# Altium PCB LF_v5_SensorBoard.PcbDoc
Units mm, origin at the board's own origin, x right, y up, seen from the top; angles counter-clockwise.
Board outline 81 x 20.29 mm, 2 copper layers (Top Layer, Bottom Layer), stack 1.571 mm thick; 27 components, 22 nets, 103 pads, 20 vias.
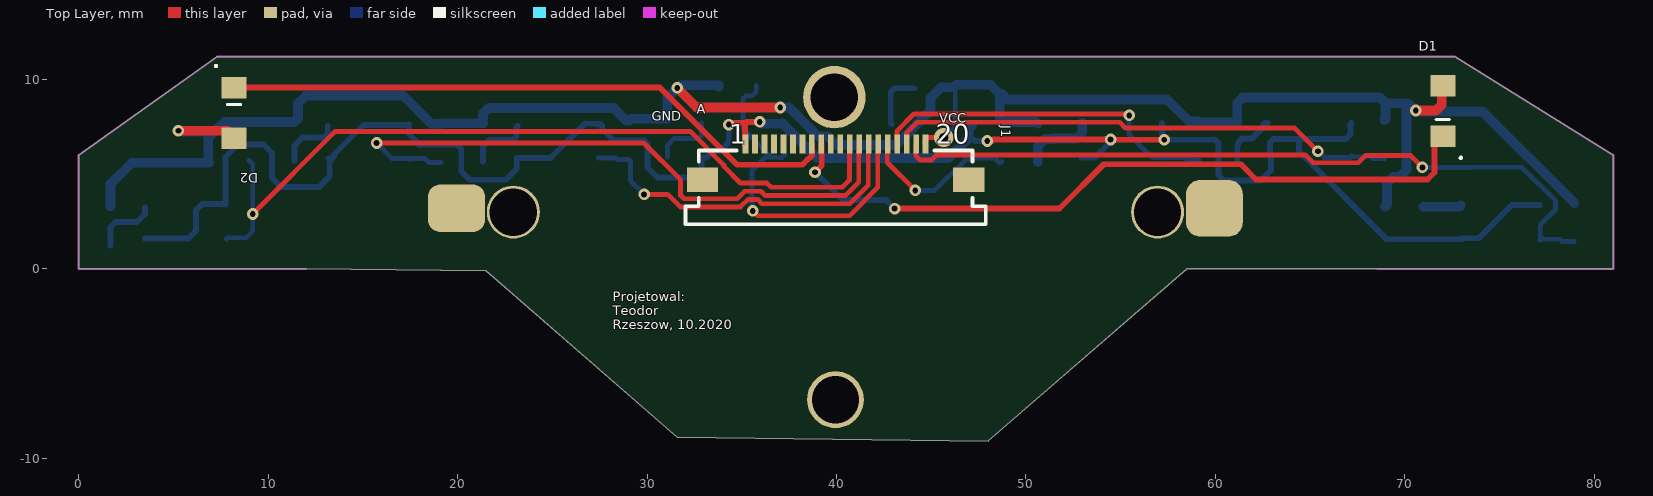
[diagram p0: Top Layer view]
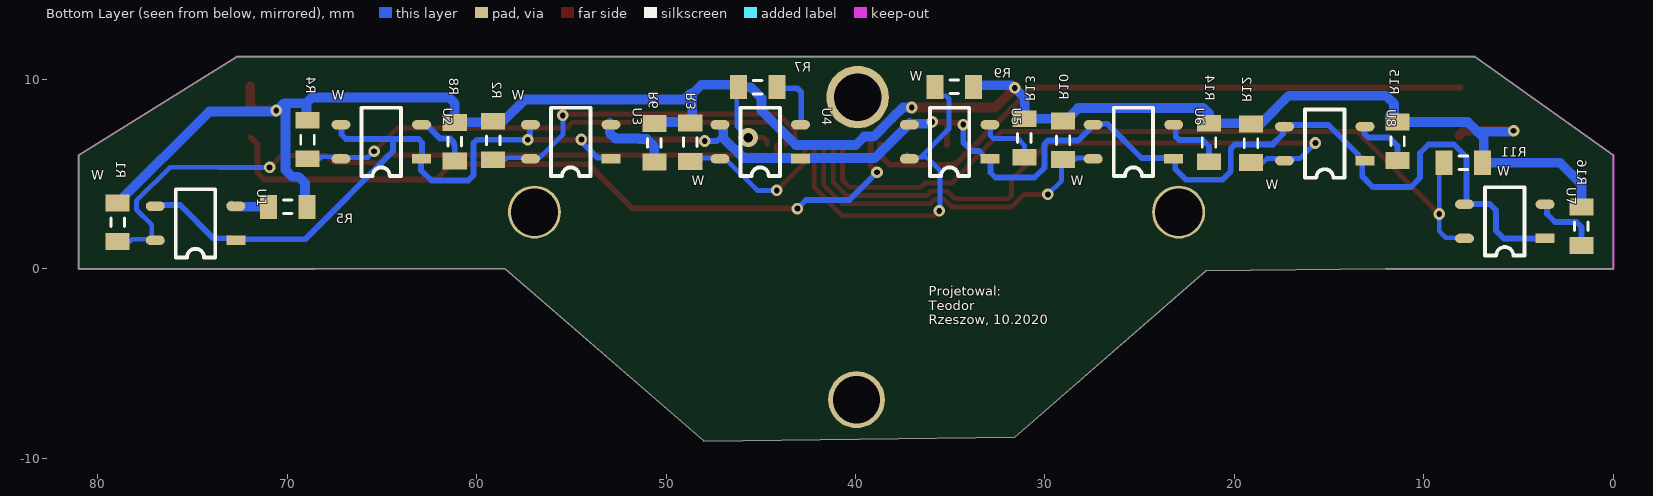
[diagram p1: Bottom Layer view, seen from below]
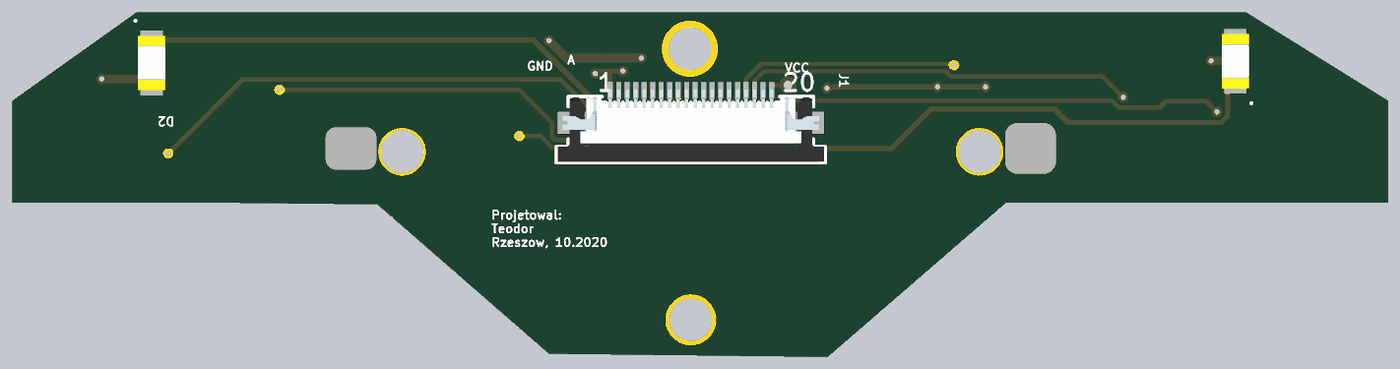
[diagram p2: 3D render of the assembled board from above, using the file's embedded part models]
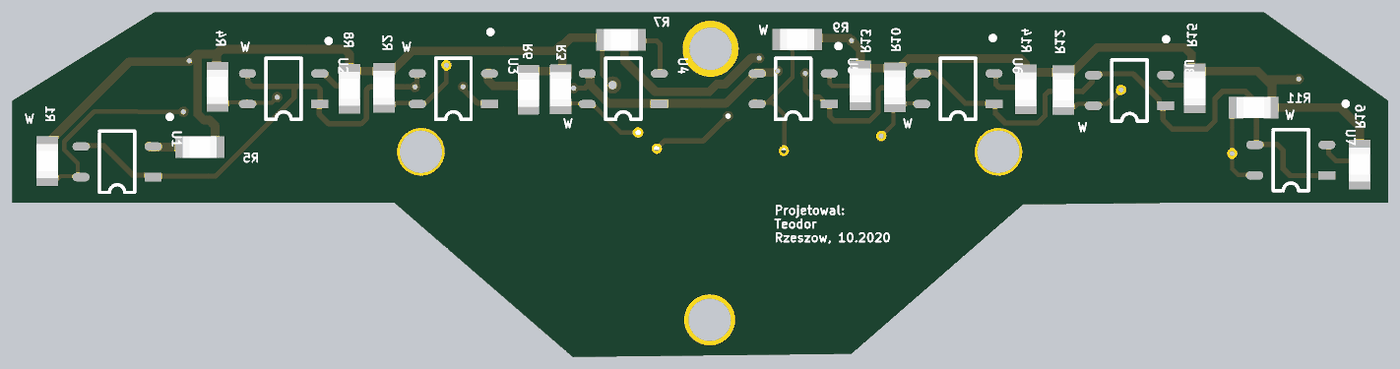
[diagram p3: 3D render of the assembled board from below, using the file's embedded part models]

## Layer stack, top to bottom
Top Solder: solder mask 0.0102, Solder Resist, Dk 3.5
Top Layer: signal copper 0.0356
Dielectric1: core 1.5, FR-4, Dk 4.8
Bottom Layer: signal copper 0.0356
Bottom Solder: solder mask 0.0102, Solder Resist, Dk 3.5

## Board outline
0,0 12,0 21.5,-0.1 31.604,-8.9 48,-9.086 58.5,0 68.449,0 81,-0.002 81,6 72.65,11.2 7.3,11.2 0,6

## Design rules (kind name [scope] priority, off if disabled: settings)
Clearance VIA-PAD [IsVIA vs IsPAD] p1: gap=0.152 ignorepadtopadclearanceinfootprint=FALSE except(0: Arc-Hole Track-Hole SMDPad-Hole THPad-Hole Via-Hole Fill-Hole Poly-Hole Region-Hole Text-Hole)
Clearance Clearance_REF [HasFootprint('Designator_blacking') or HasFootprint('Designator')] p2: gap=0.203 ignorepadtopadclearanceinfootprint=FALSE except(0: Arc-Hole Track-Hole SMDPad-Hole THPad-Hole Via-Hole Fill-Hole Poly-Hole Region-Hole Text-Hole)
Clearance Clearance_REF60 [HasFootprint('Designator_60_blacking') or HasFootprint('Designator_60')] p3: gap=0.381 ignorepadtopadclearanceinfootprint=FALSE except(0: Arc-Hole Track-Hole SMDPad-Hole THPad-Hole Via-Hole Fill-Hole Poly-Hole Region-Hole Text-Hole)
Clearance Clearance_28mil [HasFootprint('SFT01')] p4: gap=0.711 ignorepadtopadclearanceinfootprint=FALSE except(0: Arc-Hole Track-Hole SMDPad-Hole THPad-Hole Via-Hole Fill-Hole Poly-Hole Region-Hole Text-Hole)
Clearance Clearance_26mil [HasFootprint('SW-2') or HasFootprint('SW-4') or HasFootprint('SW-6') or HasFootprint('SW-8')] p5: gap=0.66 ignorepadtopadclearanceinfootprint=FALSE except(0: Arc-Hole Track-Hole SMDPad-Hole THPad-Hole Via-Hole Fill-Hole Poly-Hole Region-Hole Text-Hole)
Clearance Clearance_20mil [HasFootprint('NXW-02SMD') or HasFootprint('NXW-03SMD') or HasFootprint('NXW-04SMD') or HasFootprint('NXW-05SMD') or HasFootprint('NXW-06SMD') or HasFootprint('NXW-08SMD') or HasFootprint('NXW-10SMD') or HasFootprint('NXW-12SMD') or HasFootprint('GK2X5D_SMD_(PBMTD10S)')or HasFootprint('WE-PD2SA')   or HasFootprint('LK2X10E_SMD_(BHT20S)')] p6: gap=0.508 ignorepadtopadclearanceinfootprint=FALSE except(0: Arc-Hole Track-Hole SMDPad-Hole THPad-Hole Via-Hole Fill-Hole Poly-Hole Region-Hole Text-Hole)
Clearance Clearance_7.68mil [HasFootprint('TQFP64') vs IsPad] p7: gap=0.195 ignorepadtopadclearanceinfootprint=FALSE except(0: Arc-Hole Track-Hole SMDPad-Hole THPad-Hole Via-Hole Fill-Hole Poly-Hole Region-Hole Text-Hole)
Clearance InPolygon [InPolygon] p8: gap=0.381 ignorepadtopadclearanceinfootprint=FALSE except(0: Arc-Hole Track-Hole SMDPad-Hole THPad-Hole Via-Hole Fill-Hole Poly-Hole Region-Hole Text-Hole)
Clearance Keep-Out [OnLayer('Keep-Out Layer')] p9: gap=0.406 ignorepadtopadclearanceinfootprint=FALSE except(0: Arc-Hole Track-Hole SMDPad-Hole THPad-Hole Via-Hole Fill-Hole Poly-Hole Region-Hole Text-Hole)
Clearance RS-ZAS [InNetClass('RS_IBIS') vs InNetClass('ZAS')] p10: gap=1.778 ignorepadtopadclearanceinfootprint=FALSE except(0: Arc-Hole Track-Hole SMDPad-Hole THPad-Hole Via-Hole Fill-Hole Poly-Hole Region-Hole Text-Hole)
Clearance ON_GND-VT [InNet('ON_GND') vs InNet('VT')] p11: gap=1.778 ignorepadtopadclearanceinfootprint=FALSE except(0: Arc-Hole Track-Hole SMDPad-Hole THPad-Hole Via-Hole Fill-Hole Poly-Hole Region-Hole Text-Hole)
Clearance VT_Zasilanie [InNet('VT') vs InNetClass('ZAS')] p12: gap=1.778 ignorepadtopadclearanceinfootprint=FALSE except(0: Arc-Hole Track-Hole SMDPad-Hole THPad-Hole Via-Hole Fill-Hole Poly-Hole Region-Hole Text-Hole)
Clearance GND-VT [InNet('VT') vs InNet('GND')] p13: gap=1.778 ignorepadtopadclearanceinfootprint=FALSE except(0: Arc-Hole Track-Hole SMDPad-Hole THPad-Hole Via-Hole Fill-Hole Poly-Hole Region-Hole Text-Hole)
Clearance GND_ETH_WTÓRNA [InNetClass('ETH_WTÓRNA') vs (InNet('GND') AND InPolygon)] p14: gap=1.5 ignorepadtopadclearanceinfootprint=FALSE except(0: Arc-Hole Track-Hole SMDPad-Hole THPad-Hole Via-Hole Fill-Hole Poly-Hole Region-Hole Text-Hole)
Clearance GNT_BOTTOM [InNetClass('RS_IBIS') vs InNetClass('GND_ZAS-ON_GND')] p15: gap=1.778 ignorepadtopadclearanceinfootprint=FALSE except(0: Arc-Hole Track-Hole SMDPad-Hole THPad-Hole Via-Hole Fill-Hole Poly-Hole Region-Hole Text-Hole)
Clearance ON_GND-GND [InNet('ON_GND') vs InNet('GND')] p16: gap=1.778 ignorepadtopadclearanceinfootprint=FALSE except(0: Arc-Hole Track-Hole SMDPad-Hole THPad-Hole Via-Hole Fill-Hole Poly-Hole Region-Hole Text-Hole)
Clearance ON_GND-ALL [InNet('ON_GND')] p17: gap=0.381 ignorepadtopadclearanceinfootprint=FALSE except(0: Arc-Hole Track-Hole SMDPad-Hole THPad-Hole Via-Hole Fill-Hole Poly-Hole Region-Hole Text-Hole)
Clearance GND_ZAS_GND [InNet('GND_ZAS') vs InNet('GND')] p18: gap=1.778 ignorepadtopadclearanceinfootprint=FALSE except(0: Arc-Hole Track-Hole SMDPad-Hole THPad-Hole Via-Hole Fill-Hole Poly-Hole Region-Hole Text-Hole)
Clearance GND_ZAS-ALL [InNet('GND_ZAS')] p19: gap=0.381 ignorepadtopadclearanceinfootprint=FALSE except(0: Arc-Hole Track-Hole SMDPad-Hole THPad-Hole Via-Hole Fill-Hole Poly-Hole Region-Hole Text-Hole)
Clearance 3.3V-ALL [InNetClass('3.3V_L2_1')] p20: gap=0.508 ignorepadtopadclearanceinfootprint=FALSE except(0: Arc-Hole Track-Hole SMDPad-Hole THPad-Hole Via-Hole Fill-Hole Poly-Hole Region-Hole Text-Hole)
Clearance Clearance_1 [isvia vs isvia] p21: gap=0.305 ignorepadtopadclearanceinfootprint=FALSE except(0: Arc-Hole Track-Hole SMDPad-Hole THPad-Hole Via-Hole Fill-Hole Poly-Hole Region-Hole Text-Hole)
Clearance "raster 0.5mm" [(InPadClass('Pady 0.5mm')) vs IsTrack  Or IsPad] p22: gap=0.193 ignorepadtopadclearanceinfootprint=FALSE except(0: Arc-Hole Track-Hole SMDPad-Hole THPad-Hole Via-Hole Fill-Hole Poly-Hole Region-Hole Text-Hole)
Clearance Clearance_2 [All] p23: gap=0.178 ignorepadtopadclearanceinfootprint=FALSE except(0: Arc-Hole Track-Hole SMDPad-Hole THPad-Hole Via-Hole Fill-Hole Poly-Hole Region-Hole Text-Hole)
ComponentClearance [All] p1: gap=0 collisioncheckmode=3 verticalgap=0 showdistances=FALSE
HoleSize HoleSize_Ramka [HasFootprint('hole_frame') or HasFootprint('hole_frame1')] p1: absolutevalues=TRUE maxlimit=3 minlimit=3 maxpercent=80.000 minpercent=20.000
HoleSize [All] p2: absolutevalues=TRUE maxlimit=3.2 minlimit=0.305 maxpercent=80.000 minpercent=20.000
MinimumSolderMaskSliver MinimumSolderMaskSliver_Ramka [HasFootprint('LOGO-05X18_so')] p1: minsoldermaskwidth=0
MinimumSolderMaskSliver MinimumSolderMaskSliver_Via-Pad [IsVia vs IsPad] p2: minsoldermaskwidth=0.508
MinimumSolderMaskSliver [All] p3: minsoldermaskwidth=0.14
PolygonConnect PolygonConnect_EP [HasFootprintPad( 'TO-263_T&B',2) vs OnBottomLayer or OnTopLayer] p1: connectstyle=Direct reliefconductorwidth=0.254 reliefentries=4 polygonreliefangle="90 Angle" airgapwidth=0.254
PolygonConnect PolygonConnect_VIA [ISVIA] p2: connectstyle=Direct reliefconductorwidth=0.254 reliefentries=4 polygonreliefangle="90 Angle" airgapwidth=0.254
PolygonConnect PolygonConnect_30mil [HasFootprint('CE-SMD-J80_(H7,9MM)')] p3: connectstyle=Relief reliefconductorwidth=0.762 reliefentries=4 polygonreliefangle="90 Angle" airgapwidth=0.254
PolygonConnect PolygonConnect_24mil [HasFootprint('3528-SMDB') or HasFootprint('6032-SMDC') or HasFootprint('7343-SMDD')] p4: connectstyle=Relief reliefconductorwidth=0.61 reliefentries=4 polygonreliefangle="90 Angle" airgapwidth=0.254
PolygonConnect PolygonConnect_20mil [HasFootprint('0805R') or HasFootprint('0805C')or HasFootprint('1206R') or HasFootprint('1206C')] p5: connectstyle=Relief reliefconductorwidth=0.508 reliefentries=4 polygonreliefangle="90 Angle" airgapwidth=0.254
PolygonConnect PolygonConnect_16mil [HasFootprint('CF2040_V_(ZIF40-0,5MM)')] p6: connectstyle=Relief reliefconductorwidth=0.406 reliefentries=4 polygonreliefangle="90 Angle" airgapwidth=0.254
PolygonConnect PolygonConnect_14mil [HasFootprint('SOODIM-200_(TYCO,CONCRAFT 2,5V)') or HasFootprint('SOODIM-200_(TYCO,CONCRAFT 2,5V) - COLIBRI') or HasFootprint('TSSOP24') or HasFootprint('TSSOP20') or HasFootprint('TSSOP18') or HasFootprint('TSSOP16') or HasFootprint('TSSOP14') or HasFootprint('SSOP24-150-0.64') or HasFootprint('SOT-323-5')] p7: connectstyle=Relief reliefconductorwidth=0.356 reliefentries=4 polygonreliefangle="90 Angle" airgapwidth=0.254
PolygonConnect PolygonConnect_12mil [HasFootprint('CF2014_D_(ZIF14-0,5MM)') or HasFootprint('CF2040_U_(ODWROTNA NUMERACJA)') or HasFootprint('TQFP144') or HasFootprint('TQFP80') or HasFootprint('TQFP64') or HasFootprint('TQFP48') or HasFootprint('0603C') or HasFootprint('0603R') or HasFootprint('SOT-23-3') or HasFootprint('4D03')or HasFootprint('QFN16-0.65_(H1,6MM)')or HasFootprint('PLCC2') or HasFootprint('PLCC2-S')or HasFootprint('SFH5711')] p8: connectstyle=Relief reliefconductorwidth=0.305 reliefentries=4 polygonreliefangle="90 Angle" airgapwidth=0.254
PolygonConnect PolygonConnect_11mil [HasFootprint('QFN20_B&T') or HasFootprint('QFN24_B&T') or HasFootprint('QFN32_31_B&T') or HasFootprint('QFN32_34_B&T') or HasFootprint('QFN36_30x40_LT3958_B&T') or HasFootprint('QFN36_37_B&T') or HasFootprint('QFN36_44_B&T') or HasFootprint('QFN40_41_B&T') or HasFootprint('QFN40_44_B&T_1')or HasFootprint('QFN56_59_B&T')] p9: connectstyle=Relief reliefconductorwidth=0.279 reliefentries=4 polygonreliefangle="90 Angle" airgapwidth=0.254
PolygonConnect PolygonConnect_13mil [HasFootprint('QFN12-0.80_21_B&T') or HasFootprint('QFN16-0.65_21_B&T')] p10: connectstyle=Relief reliefconductorwidth=0.33 reliefentries=4 polygonreliefangle="90 Angle" airgapwidth=0.254
PolygonConnect PolygonConnect_10mil [HasFootprint('D0603') or HasFootprint('0402') or HasFootprint('D0603R') or HasFootprint('D0603G') or HasFootprint('D0603B') or HasFootprint('D0603Y') or HasFootprint('0402R') or HasFootprint('0402C')] p11: connectstyle=Relief reliefconductorwidth=0.254 reliefentries=4 polygonreliefangle="90 Angle" airgapwidth=0.254
PolygonConnect PolygonConnect_NoConnect [HasFootprint('SFT01') or HasFootprint('SW-2') or HasFootprint('SW-4') or HasFootprint('SW-6') or HasFootprint('SW-8') or HasFootprint('SOT-223') or HasFootprint('SOT-223_')] p12: connectstyle=NoConnect reliefconductorwidth=0.381 reliefentries=4 polygonreliefangle="90 Angle" airgapwidth=0.254
PolygonConnect PolygonConnect_1 [ispad] p13: connectstyle=Relief reliefconductorwidth=0.508 reliefentries=4 polygonreliefangle="90 Angle" airgapwidth=0.254
PolygonConnect [All] p14: connectstyle=Relief reliefconductorwidth=0.508 reliefentries=4 polygonreliefangle="90 Angle" airgapwidth=0.254
RoomDefinition LFEK_Moduł_Z_Czujnikamiv4 [InComponentClass('LFEK_Moduł_Z_Czujnikamiv4')] p1: confinementstyle=ConfineOut formatcopy=TRUE lockcomponents=FALSE outline 35.704,-18.13 48.46,-18.13 48.46,-14.553 35.704,-14.553
RoutingVias [All] p1: holewidth=0.508 width=1.016 viastyle="Through Hole" minholewidth=0.305 minwidth=0.61 maxholewidth=2.5 maxwidth=3
SMDToCorner [All] p1: distance=100
SilkToSilkClearance SilkToSilkClearance_JMP2_SMD [HasFootprint('JMP2_SMD')] p1: silktosilkclearance=0
SilkToSilkClearance [All] p2: silktosilkclearance=0.025
SilkToSolderMaskClearance SilkscreenOverComponentPads [IsPad] p1: minsilkscreentomaskgap=0.152 clearancetoexposedcopper=TRUE
SolderMaskExpansion [All] p1: expansion=0.025 istentingtop=FALSE
Width Width_Ramka [HasFootprint('hole_frame') or HasFootprint('hole_frame1') or HasFootprint('Designator_blacking_B&T1') or HasFootprint('Designator_blacking_B&T2') or HasFootprint('Designator_blacking_B&T3') or HasFootprint('Designator_blacking_B&T4') or HasFootprint('Designator_blacking_B&T5')] p1: maxlimit=2.6 minlimit=0.254 preferedwidth=0.254
Width [All] p2: maxlimit=2.54 minlimit=0.203 preferedwidth=0.254
25 further rules are at their usual default settings.

## Components (designator, comment, footprint, x,y, rotation, side; value= is the part's Value field where it differs from the comment)
D1 "LED" D1206_2 72,6.683 r90 top
D2 "LED" D1206_2 8.2,9.884 r270 top
J1 "687120183722" 687120183722 39.95,4.3 r0 top
R1 "160k-1%" 0805R#1 78.94,3.47 r270 bottom
R2 "160k-1%" 0805R#1 59.124,7.792 r270 bottom
R3 "160k-1%" 0805R#2 48.721,7.706 r270 bottom
R4 "160k-1%" 0805R#1 68.921,7.84 r270 bottom
R5 "1k-1%" 0805R#1 68.943,3.275 r0 bottom
R6 "1k-1%" 0805R#2 50.615,7.665 r270 bottom
R7 "1k-1%" 0805R#1 46.182,9.59 r180 bottom
R8 "1k-1%" 0805R#1 61.15,7.732 r270 bottom
R9 "160k-1%" 0805R#1 33.775,9.608 r0 bottom
R10 "160k-1%" 0805R#1 29.044,7.809 r270 bottom
R11 "160k-1%" 0805R#1 6.9,5.6 r0 bottom
R12 "160k-1%" 0805R#1 19.125,7.65 r270 bottom
R13 "1k-1%" 0805R#1 31.084,7.922 r270 bottom
R14 "1k-1%" 0805R#1 21.341,7.686 r270 bottom
R15 "1k-1%" 0805R#1 11.39,7.748 r270 bottom
R16 "1k-1%" 0805R#1 1.687,3.27 r270 bottom
U1 "Ktir0711s" KTIR0711S_FP 74.6,2.5 r270 bottom
U2 "Ktir0711S" KTIR0711S_FP 64.8,6.8 r270 bottom
U3 "Ktir0711S" KTIR0711S_FP 54.8,6.8 r270 bottom
U4 "Ktir0711S" KTIR0711S_FP 44.8,6.8 r270 bottom
U5 "Ktir0711S" KTIR0711S_FP 34.8,6.8 r270 bottom
U6 "Ktir0711S" KTIR0711S_FP 25.1,6.8 r270 bottom
U7 "Ktir0711S" KTIR0711S_FP 5.5,2.6 r270 bottom
U8 "Ktir0711S" KTIR0711S_FP 15,6.7 r270 bottom

## Footprints (in the part's own frame and the unit in brackets; to place one, negate y for a bottom-side part, rotate by r counter-clockwise, add the part's x,y. Pads: shape width x height; smd on the part's side, far side on the other; paste and mask are expansions set on the pad)
0805R#1 [mil]
  rect 35x50 smd mask+1: 1(0,0) 2(80,0)
  silkscreen extent 31,-14 49,14, body extent 1,-25 79,25, height 23
0805R#2 [mil]
  rect 35x50 smd: 1(0,0) 2(80,0)
  silkscreen extent 31,-14 49,14, body extent 1,-25 79,25, height 23
687120183722 [mm] "ZIF Connectors, Horizontal, Bottom Contact Low Profile, pitch 0.5mm, 20p"
  rect 0.3x1 smd: 1(-4.75,2.3) 2(-4.25,2.3) 3(-3.75,2.3) 4(-3.25,2.3) 5(-2.75,2.3) 6(-2.25,2.3) 7(-1.75,2.3) 8(-1.25,2.3) 9(-0.75,2.3) 10(-0.25,2.3) 11(0.25,2.3) 12(0.75,2.3) 13(1.25,2.3) 14(1.75,2.3) 15(2.25,2.3) 16(2.75,2.3) 17(3.25,2.3) 18(3.75,2.3) 19(4.25,2.3) 20(4.75,2.3)
  rect 1.65x1.3 smd: MP1(-7.025,0.4) MP2(7.025,0.4)
  silkscreen extent -7.92,-1.95 7.93,1.95, body extent -7.85,-1.9 7.85,2.35, height 1.28
D1206_2 [mil]
  rect 45x52 smd mask+1: 1(12.5,0) 2(117.5,0)
  silkscreen extent -34,-40 48,14, body extent 2,-31 128,32, height 43
KTIR0711S_FP [mm]
  oval 0.5x1 smd: 1(-0.807,1.895) 3(0.993,-2.355) 4(-0.807,-2.355)
  rect 0.5x1 smd: 2(0.993,1.895)
  silkscreen extent -1.71,-1.27 1.89,0.81, body extent -1.4,-2.29 1.65,1.91, height 2

## Part data
D1 D2: library part "LL-S150BC-B4-1B  D1206", "Dioda LED Niebieska  120°   20mA   14-22 mCd", Index=24360, Nazwa=LL-S150BC-B4-1B
J1: library part CMP-1502-01579-1, "SMT ZIF Connectors Low Profile WR-FPC, Horizontal, Bottom Contact, pitch 0.5 mm, 20 pins", Contact Resistance=30mOhm, Manufacturer="Wurth Elektronik", Operating Temperature=-25to85degC, Rated Current=0.4A, Withstanding Voltage=250VAC, Working Voltage=50VAC, Contact Design=BottomContact, Datasheet URL=https://katalog.we-online.de/em/datasheet/687120183722.pdf, Manufacturer URL=http://www.we-online.de, Mounting Technology=SMT, Orientation=Horizontal, Package Reference=687120183722, Packaging=TapeandReel, Part Number=687120183722, Pin Number=20, Pitch=0.5mm, Publisher=WurthElektronik
R1 R2 R3 R4 R9 R10 R11 R12: library part "160k-1%  0805", "Rezystor 0,125W", Nazwa=160k-1%
R5 R6 R7 R8 R13 R14 R15 R16: library part "1k-1%  0805", "Rezystor 0,125W", Nazwa=1k-1%
U1 U2 U3 U4 U5 U6 U7 U8: library part Component_1

## Free pads (board coordinates)
  rrect50% 3x2.5 smd: 1(19.944,3.197)
  round 2.8 hole 2.5 mask+0.025: 1(22.944,2.997) 1(56.944,2.997)
  round 3.3 hole 2.5 mask+0.025: 1(39.889,9.066)
  round 3 hole 2.5 mask+0.025: 1(39.944,-6.903)
  rrect50% 3x3 smd: 1(59.944,3.197)
  round 0.5 on Bottom Overlay: 2(71.725,5.05) 3(62.375,9.525) 4(52.85,10.05) 6(32.364,9.219) 7(23.275,9.7) 8(13.075,9.625) 9(2.5,5.825)

## Via types
v1: diameter 0.61, hole 0.305, Top Layer to Bottom Layer, tented both sides, 12 vias
v2: diameter 0.61, hole 0.305, Top Layer to Bottom Layer, 7 vias
v3: diameter 1.016, hole 0.508, Top Layer to Bottom Layer, tented both sides, 1 vias

## Nets (pads, with @x,y where several pads share a name; then routed paths per layer and width w, separated by ;. In a path a pad name is that pad's centre, name@x,y a point inside that pad or via, vN(x,y) a via of type N, cw(c..) or ccw(c..) an arc to the next point about the centre after c; other vN are vias at no path point)
ADC1_0: J1.19 R1.2 U1.3 | length 40.2
  Top Layer w0.254: J1.19@44.177,6.553 44.177,5.972 44.401,5.748 45.026,5.748 45.295,6.017 64.737,6.017 65.153,5.6 67.535,5.6 67.915,5.98 70.296,5.98 v1(70.922,5.354)
  Bottom Layer w0.254: v1(70.922,5.354) 73.584,5.354 ; 73.624,5.367 76.177,5.367 77.949,3.595 77.949,3.132 77.144,2.327 U1.3@77.144,1.565 ; U1.3@77.124,1.517 77.172,1.565 U1.3@77.183,1.565 ; U1.3@77.178,1.56 U1.3@77.183,1.565 ; U1.3@77.239,1.621 U1.3@77.183,1.565 ; R1.2 78.305,1.438 78.178,1.565 U1.3@77.183,1.565
ADC1_1: J1.18 R4.2 U2.3 | length 26.9
  Top Layer w0.254: J1.18@43.677,6.553 43.7,6.576 43.7,7.181 44.259,7.74 54.939,7.74 55.252,7.427 64.189,7.427 v1(65.406,6.21)
  Bottom Layer w0.254: v1(65.406,6.21) 65.731,5.885 U2.3@67.159,5.885 ; U2.3@67.174,5.957 67.218,5.913 68.181,5.913 68.286,5.808 R4.2
ADC1_2: J1.17 R2.2 U3.3 | length 18.6
  Top Layer w0.254: J1.17@43.177,6.553 43.2,6.576 43.2,7.292 44.08,8.172 55.273,8.172 55.348,8.097 v2(55.444,8.097)
  Bottom Layer w0.254: v2(55.444,8.097) 55.444,7.089 56.668,5.865 57.194,5.865 U3.3@57.197,5.868 ; U3.3@57.254,5.837 57.282,5.865 58.384,5.865 58.489,5.76 R2.2
ADC1_3: J1.16 R3.2 U4.3 | length 8.6
  Top Layer w0.254: J1.16@42.677,6.553 42.677,5.614 v2(44.154,4.137)
  Bottom Layer w0.254: v2(44.154,4.137) 45.187,4.137 46.82,5.77 46.834,5.755 47.15,5.755 U4.3@47.245,5.85 ; U4.3 47.201,5.807 U4.3@47.245,5.85 ; R3.2 48.619,5.573 48.342,5.85 U4.3@47.245,5.85
ADC1_4: J1.15 R9.2 U5.3 | length 18.7
  Top Layer w0.254: v2(35.582,3.056) 35.831,2.807 40.688,2.807 42.177,4.296 J1.15@42.177,6.553
  Bottom Layer w0.254: v2(35.582,3.056) 35.547,3.091 35.547,5.196 36.245,5.894 36.557,5.894 ; R9.2@35.764,9.677 35.764,9.352 35.553,9.141 35.228,9.141 35.064,8.977 35.064,7.387 36.557,5.894 ; U5.3@37.13,5.868 36.886,5.868 36.86,5.894 36.557,5.894 ; U5.3@37.159,5.911 U5.3@37.275,6.027
ADC1_5: J1.14 R10.2 U6.3 | length 18.8
  Top Layer w0.254: v2(29.844,3.927) 31.097,3.927 31.757,3.266 34.93,3.266 35.329,3.666 35.834,3.666 36.064,3.437 40.707,3.437 41.677,4.407 J1.14@41.677,6.553
  Bottom Layer w0.254: U6.3@27.424,5.877 27.451,5.85 28.336,5.85 28.409,5.777 R10.2 29.124,5.697 29.124,4.647 v2(29.844,3.927)
ADC1_6: J1.13 R12.2 U8.3 | length 33.5
  Top Layer w0.254: v2(15.724,6.643) 29.821,6.643 31.772,4.692 31.772,3.877 31.951,3.698 34.751,3.698 35.151,4.098 36.013,4.098 36.242,3.869 40.466,3.869 41.177,4.58 J1.13@41.177,6.553
  Bottom Layer w0.254: v2(15.724,6.643) 16.546,5.821 U8.3@17.436,5.821 ; U8.3@17.474,5.757 17.538,5.821 18.287,5.821 18.49,5.618 R12.2
ADC1_7: J1.12 R11.2 U7.3 | length 41.9
  Top Layer w0.254: v2(9.185,2.896) 13.542,7.253 32.278,7.253 34.055,5.476 34.055,5.406 34.931,4.53 36.328,4.53 36.555,4.302 40.288,4.302 40.516,4.53 40.677,4.691 J1.12@40.677,6.553
  Bottom Layer w0.254: U7.3@7.798,1.582 7.858,1.642 8.835,1.642 9.185,1.992 v2(9.185,2.896) 9.185,5.526 R11.2@8.992,5.719
ADC1_8: J1.11
ADC1_9: J1.10
Anoda: R5.2 U1.1 | length 2
  Bottom Layer w0.508: R5.2 72.882,3.275 U1.1@72.954,3.347
GND: J1.1 U1.2 U1.4 U2.2 U2.4 U3.2 U3.4 U4.2 U4.4 U5.2 U5.4 U6.2 U6.4 U7.2 U7.4 U8.2 U8.4 | length 106.2
  Top Layer w0.305: v1(34.314,7.617) 34.414,7.717 35.174,7.717 J1.1@35.174,6.994 ; J1.1@35.175,6.993 35.175,6.555 J1.1@35.177,6.553 ; 35.184,7.677 35.264,7.757 v1(35.944,7.757) ; v1(47.96,6.749) 47.962,6.747 48.194,6.747 48.274,6.827 v1(54.464,6.827) 54.474,6.817 v1(57.294,6.817)
  Bottom Layer w0.305: U7.2@3.5,1.6 5.787,1.6 6.194,2.007 6.194,3.097 6.524,3.427 U7.4@7.724,3.427 ; U7.4@7.75,3.4 7.75,5.901 8.416,6.567 9.754,6.567 10.204,6.117 10.204,4.807 10.684,4.327 12.694,4.327 13.254,4.887 U8.2@13.254,5.821 ; U8.2@13.186,5.821 U8.2@13.254,5.821 ; U8.4@17.436,7.621 U8.4@17.436,7.597 ; 17.994,6.527 18.034,6.567 19.964,6.567 20.194,6.337 20.194,5.137 20.634,4.697 22.554,4.697 23.125,5.268 23.125,5.85 24.907,5.85 26.714,7.657 U6.4@27.314,7.657 ; 18.004,6.547 17.436,7.115 U8.4@17.436,7.597 ; U6.4@27.375,7.65 27.535,7.65 27.625,7.56 27.625,7.4 28.258,6.767 29.848,6.767 30.027,6.588 30.027,5.337 30.547,4.817 32.615,4.817 32.88,5.081 32.88,5.778 32.909,5.807 U5.2@32.944,5.807 ; U5.2@32.874,5.877 33.139,5.877 33.479,6.217 33.854,6.217 34.314,6.677 v1(34.314,7.617) ; 46.984,7.067 47.302,6.749 v1(47.96,6.749) ; U3.2@52.919,5.865 53.622,5.865 54.406,6.649 54.406,6.769 v1(54.464,6.827) ; U3.4@57.174,7.707 57.174,7.019 57.294,6.899 v1(57.294,6.817) 59.975,6.817 60.154,6.638 60.154,4.937 60.434,4.657 62.384,4.657 62.924,5.197 U2.2@62.924,5.837 ; U2.2@62.875,5.913 62.875,6.668 63.054,6.847 64.404,6.847 66.887,6.847 67.125,7.085 67.125,7.623 67.164,7.661 U2.4@67.164,7.717 ; 64.404,6.845 64.404,6.204 69.041,1.567 U1.2@73.014,1.567 ; U1.2@72.934,1.617 73.894,1.617 75.642,3.365 U1.4@77.144,3.365 ; U8.2@13.254,5.821 13.383,5.821 13.473,5.911 13.473,6.04 15.03,7.597 U8.4@17.436,7.597
  Bottom Layer w0.508: v1(35.944,7.757) 36.033,7.668 U5.4@37.13,7.668 ; U5.4@37.134,7.697 38.981,5.85 42.9,5.85 45.916,5.85 46.982,6.916 46.982,7.395 U4.4@47.164,7.577
LED3_OUT: D1.1 J1.9 | length 38.6
  Top Layer w0.305: v1(38.864,5.097) 39.22,5.453 39.22,6.142 39.202,6.16 39.202,6.598 J1.9 ; v2(43.062,3.181) 51.765,3.181 54.106,5.522 61.342,5.522 62.146,4.719 71.185,4.719 71.557,5.091 71.557,6.576 D1.1@71.926,6.945
  Bottom Layer w0.305: v1(38.864,5.097) 40.324,3.637 42.606,3.637 v2(43.062,3.181)
LED4_OUT: D2.1 J1.8 | length 33.2
  Top Layer w0.305: D2.1@8.053,9.573 30.67,9.573 34.743,5.5 38.2,5.5 38.47,5.77 38.487,5.77 38.7,5.983 J1.8
NetR6_2: R6.2 U3.1 | length 4
  Bottom Layer w0.508: R6.2 50.615,6.448 51.019,6.852 51.429,6.852 51.454,6.877 52.676,6.877 52.974,7.175 U3.1@52.974,7.697
NetR7_2: R7.2 U4.1 | length 3
  Bottom Layer w0.305: U4.1@42.9,7.65 42.864,7.686 42.864,9.327 43.074,9.537 R7.2@44.084,9.537
NetR8_2: R8.2 U2.1 | length 3.1
  Bottom Layer w0.305: R8.2 61.15,6.523 61.204,6.577 61.204,6.677 61.414,6.887 61.944,6.887 62.528,7.471 62.528,7.615 62.609,7.697 U2.1@62.754,7.697
NetR13_2: R13.2 U5.1 | length 3.3
  Bottom Layer w0.254: R13.2 31.084,6.527 31.444,6.887 32.725,6.887 32.874,7.036 U5.1@32.874,7.697
NetR14_2: R14.2 U6.1 | length 3.4
  Bottom Layer w0.305: R14.2 21.341,6.464 21.674,6.797 22.915,6.797 23.094,6.976 23.094,7.467 U6.1@23.174,7.547
NetR15_2: R15.2 U8.1 | length 3.2
  Bottom Layer w0.305: R15.2 11.39,6.503 11.814,6.927 12.934,6.927 13.144,7.137 U8.1@13.144,7.557
NetR16_2: R16.2 U7.1 | length 3.4
  Bottom Layer w0.305: R16.2 1.687,2.214 1.94,2.467 3.074,2.467 3.504,2.897 U7.1@3.504,3.247
VCC: D1.2 D2.2 J1.20 R1.1 R2.1 R3.1 R4.1 R5.1 R6.1 R7.1 R8.1 R9.1 R10.1 R11.1 R12.1 R13.1 R14.1 R15.1 R16.1 | length 115.5
  Top Layer w0.254: J1.20@44.677,6.553 44.677,6.77 44.834,6.927 v3(45.664,6.927)
  Top Layer w0.508: v1(5.264,7.287) 7.874,7.287 D2.2@8.134,7.027 ; v1(31.594,9.547) 32.624,8.517 v1(37.034,8.517) ; v1(70.574,8.357) 71.636,8.357 71.934,8.655 D1.2@71.934,9.637
  Bottom Layer w0.254: v3(45.664,6.927) 46.268,7.531 R7.1@46.268,9.549
  Bottom Layer w0.508: R16.1@1.684,3.307 1.684,4.477 2.807,5.6 R11.1 ; v1(5.264,7.287) 5.309,7.242 7.179,7.242 ; R11.1@6.764,5.667 6.836,5.739 6.836,6.9 7.179,7.242 ; R12.1@19.103,7.686 R14.1 ; R12.1 18.621,7.65 17.134,9.137 11.994,9.137 11.574,8.717 11.574,8.037 11.574,7.932 R15.1 7.685,7.748 7.179,7.242 ; R14.1@21.324,7.907 21.324,7.923 21.341,7.94 21.341,8.194 21.639,8.492 28.234,8.492 28.917,7.809 R10.1 ; R10.1@29.134,7.897 29.159,7.922 R13.1 31.084,8.027 31.064,8.047 31.064,9.017 v1(31.594,9.547) 31.744,9.697 33.784,9.697 33.784,9.617 R9.1 ; v1(37.034,8.517) 37.495,8.517 38.061,7.95 39.027,6.984 39.537,6.984 39.985,6.536 43.146,6.536 44.963,8.352 44.963,9.012 45.541,9.59 R7.1 ; R7.1@46.314,9.717 48.134,9.717 48.615,9.236 48.615,7.811 R3.1 48.764,7.749 50.531,7.749 R6.1 ; 48.674,9.277 49.014,8.937 57.444,8.937 58.589,7.792 R2.1 ; R2.1@59.184,7.747 61.135,7.747 R8.1 61.15,8.749 61.448,9.047 68.676,9.047 68.974,8.749 ; R4.1 68.974,7.893 68.974,8.037 68.974,8.749 ; R5.1 69.054,3.386 69.054,4.517 69.405,4.868 69.735,4.868 70.084,5.217 70.084,8.749 ; v1(70.574,8.357) 70.544,8.357 70.152,8.749 70.084,8.749 ; v1@70.594,8.307 74.103,8.307 R1.1 ; 68.974,8.749 70.084,8.749
pads on no net: J1.2 J1.3 J1.4 J1.5 J1.6 J1.7 J1.MP1 J1.MP2

## Keep-outs
Keep-Out Layer:
  lines w0.1: 12,0 0,0 0,6 7.3,11.2 72.65,11.2 81,6 81,-0.002 68.537,0

## Silkscreen, mask and mechanical layers (free items; w line width, h text height)
Top Overlay:
  text "A" at 32.622,8.175 h0.5
  text "GND" at 30.244,7.807 h0.5
  text "VCC" at 45.424,7.707 h0.5
  text "Projetowal: / Teodor  / Rzeszow, 10.2020" at 28.2,-3.2 h0.5
Bottom Overlay:
  text "W" at 37.137,9.924 h0.5
  text "W" at 58.137,8.924 h0.5
  text "W" at 67.637,8.924 h0.5
  text "W" at 6.137,4.924 h0.5
  text "W" at 80.344,4.697 h0.5
  text "W" at 28.637,4.424 h0.5
  text "W" at 48.637,4.424 h0.5
  text "W" at 18.344,4.197 h0.5
  text "Projetowal: / Teodor / Rzeszow, 10.2020" at 36.144,-2.924 h0.5
Milling:
  the board outline again, w0.1

## Text inside footprints (layer, text, board x,y; h text height)
J1: Top Overlay "1" at 34.35,6.6 h1.02; Top Overlay "20" at 45.25,6.6 h1.02